# Altium PCB STM32F030C8T6.PcbDoc (part 1 of 2)
Units mil, origin at the board's own origin, x right, y up, seen from the top; angles counter-clockwise.
Board outline 2425 x 2425 mil, 2 copper layers (Top Layer, Bottom Layer); 23 components, 16 nets, 125 pads, 8 vias.
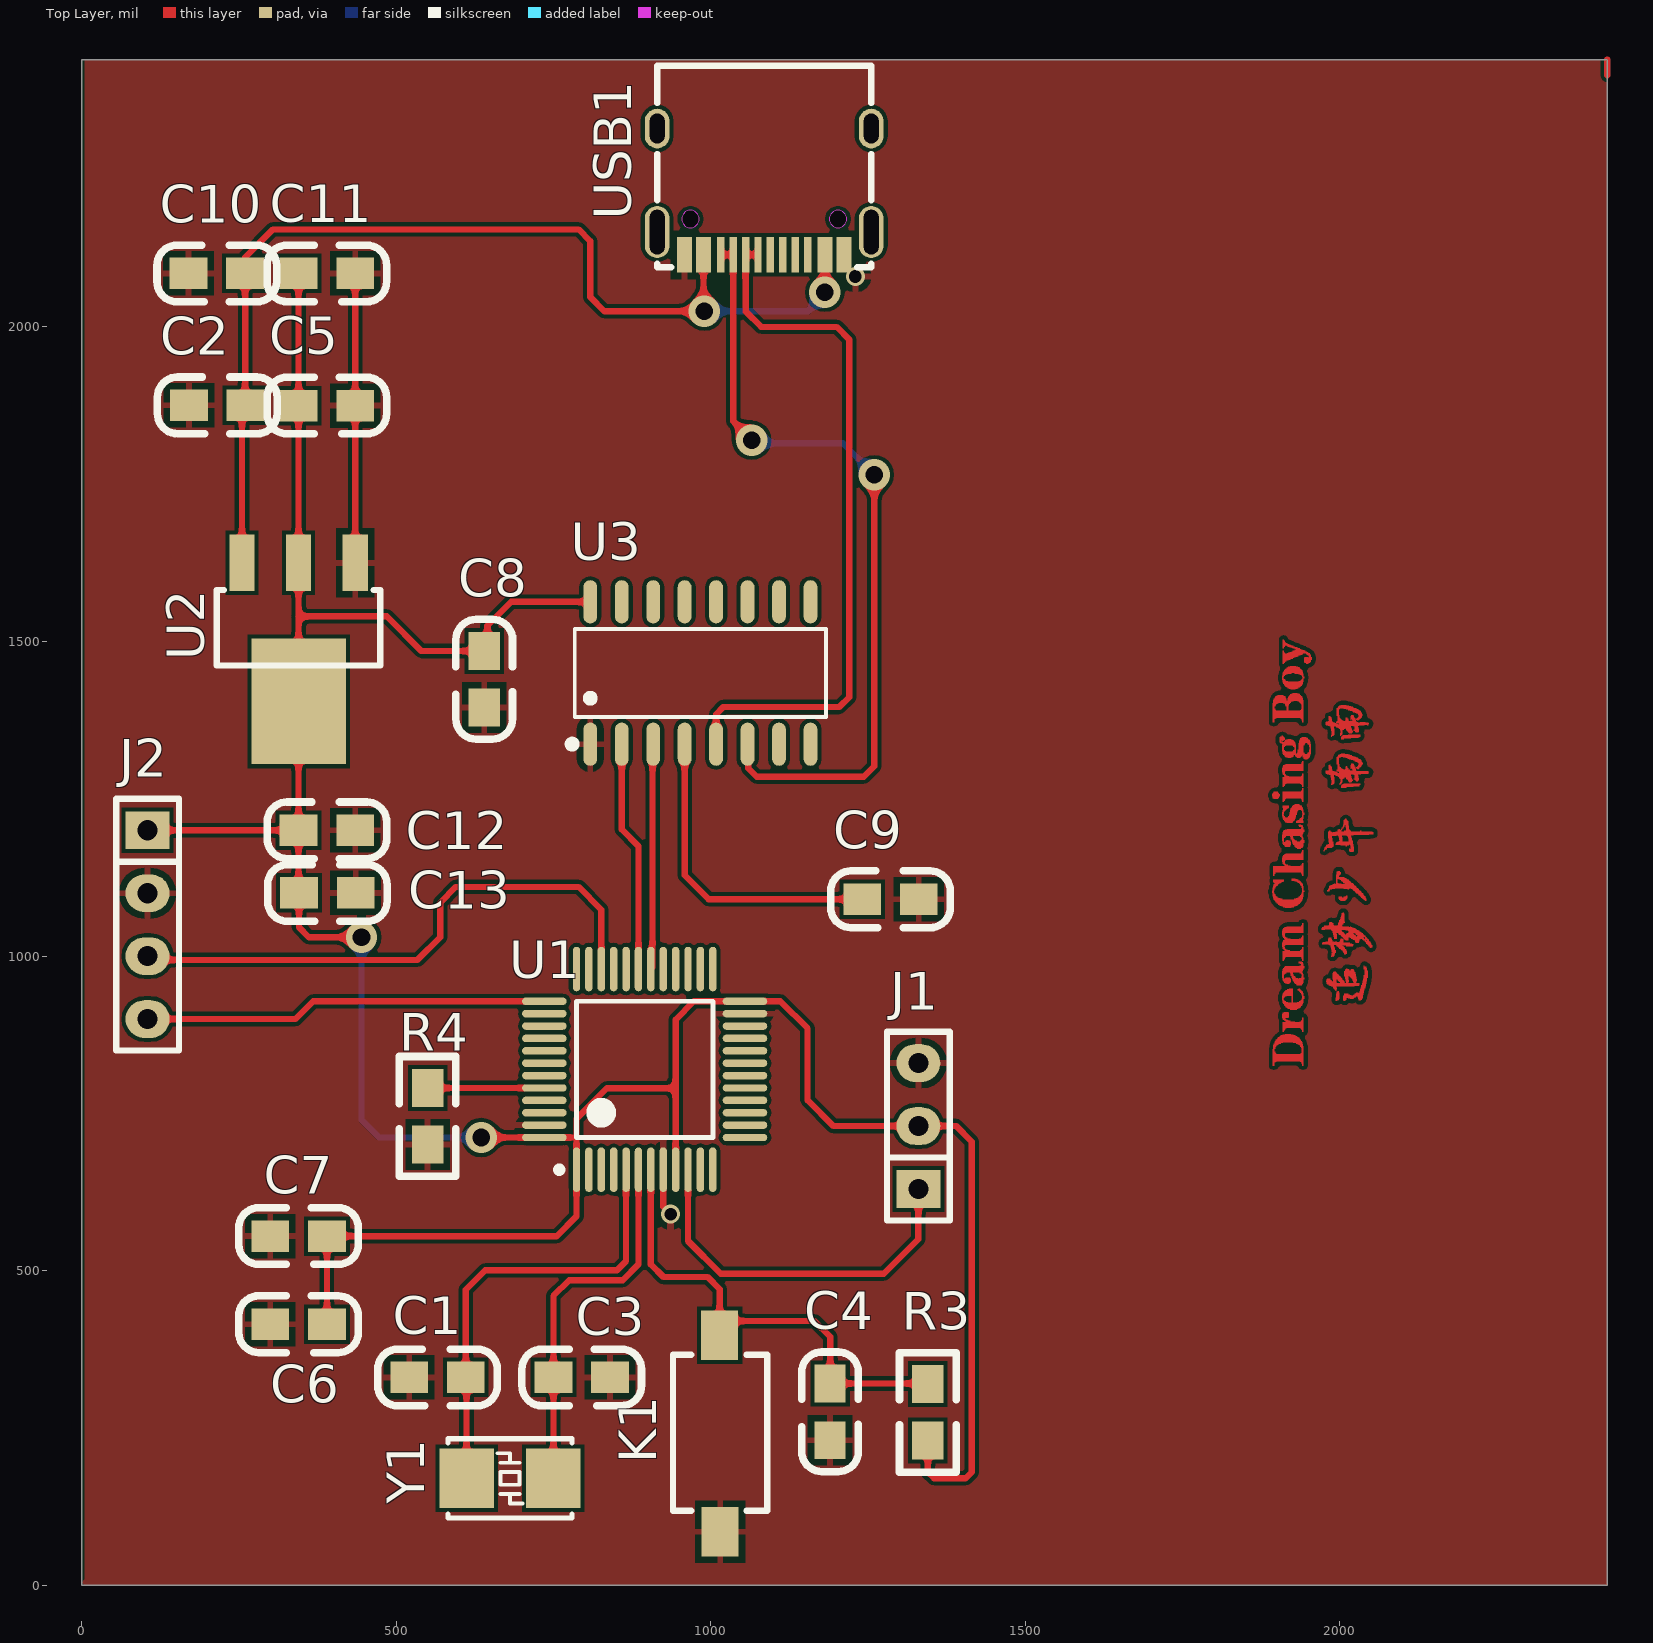
[diagram p0: Top Layer view]
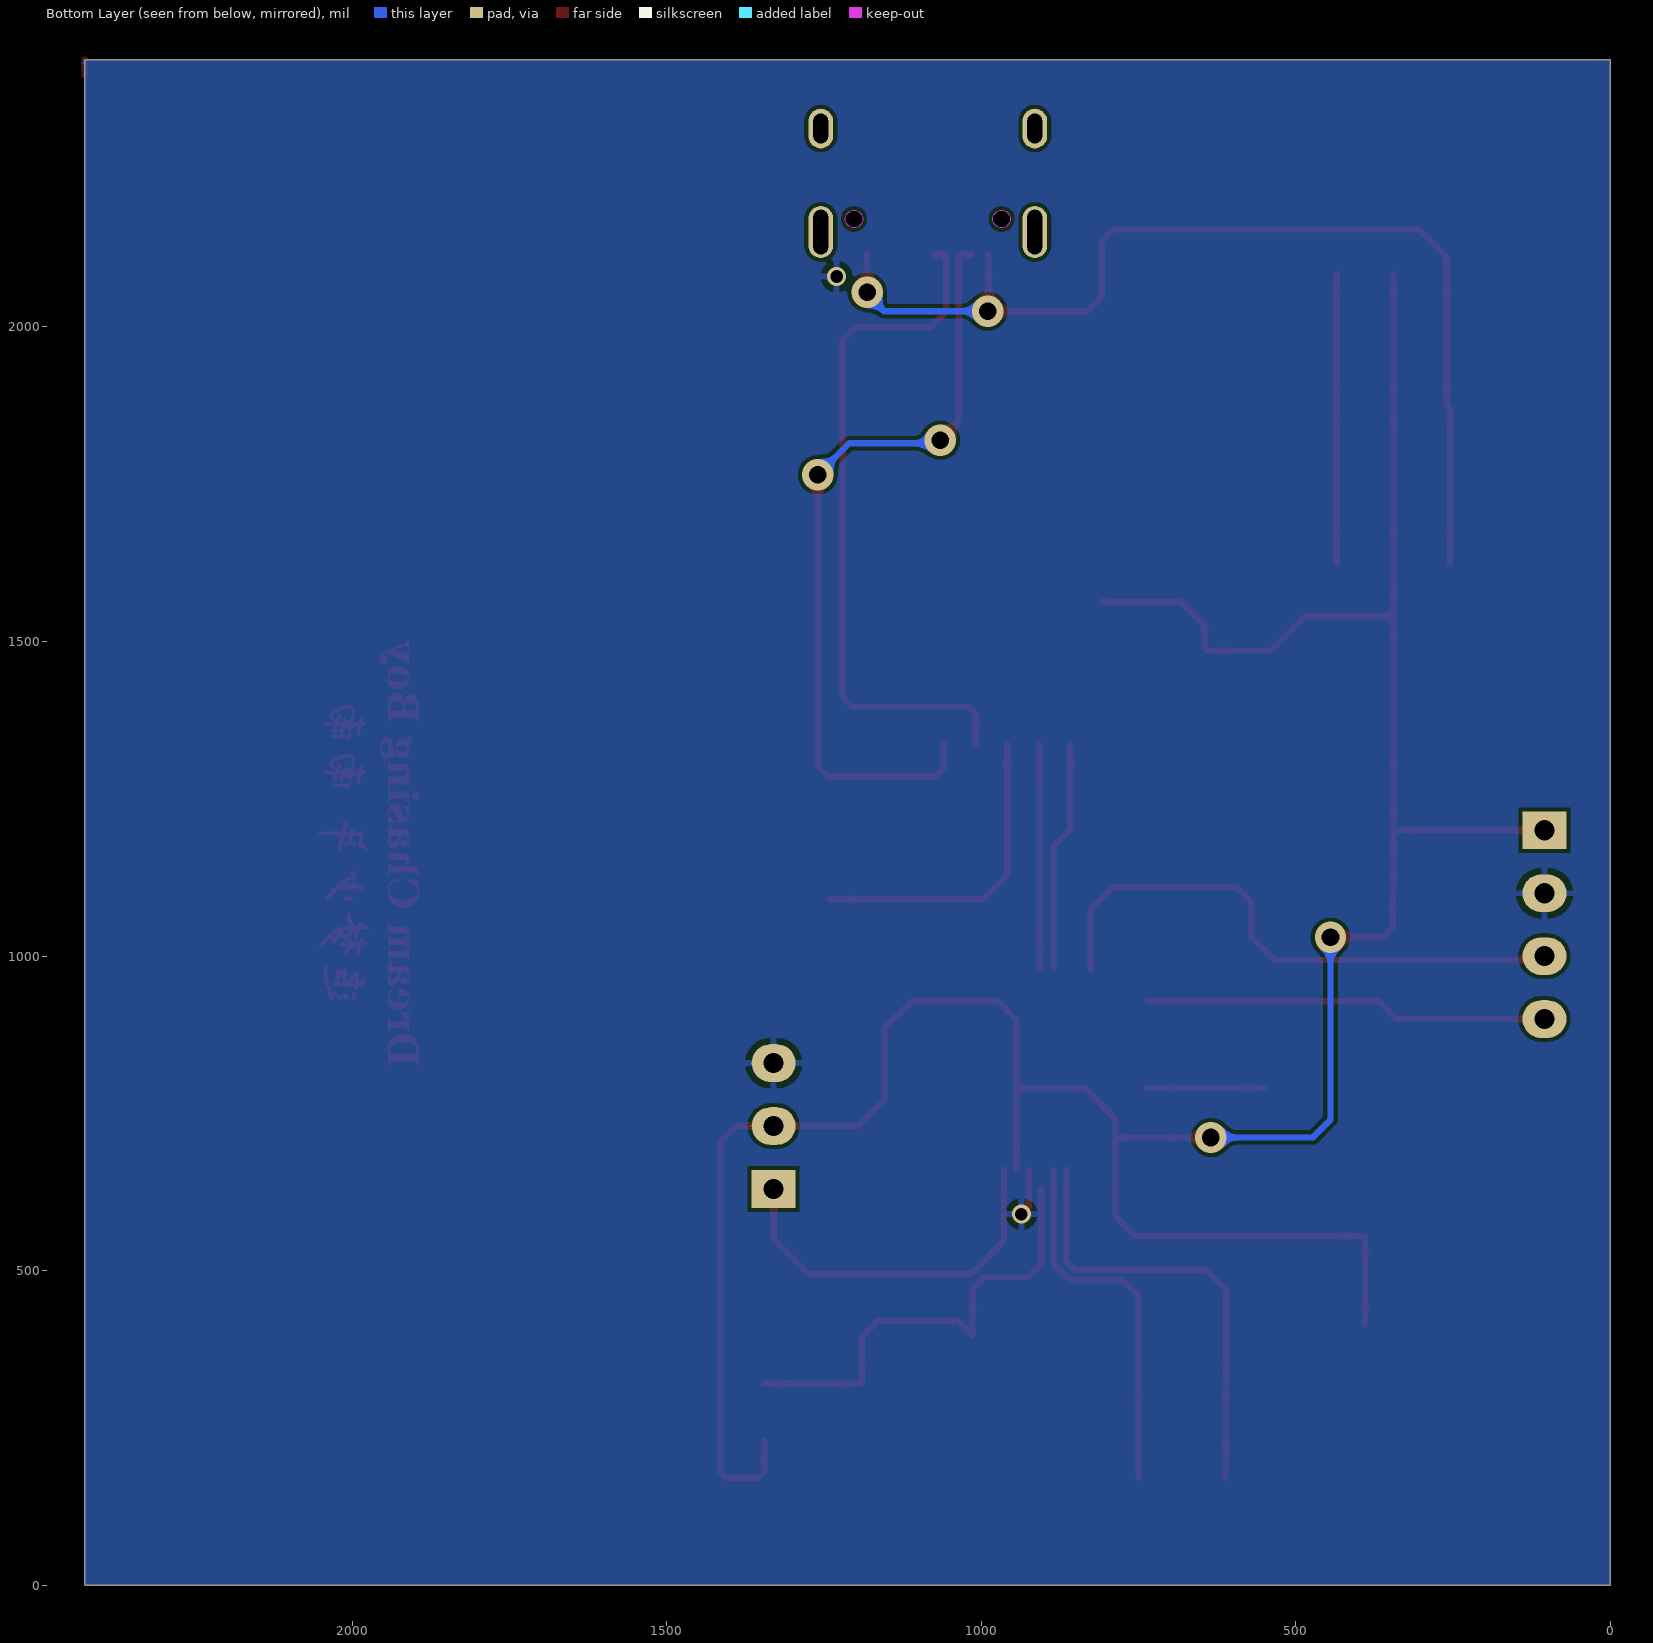
[diagram p1: Bottom Layer view, seen from below]
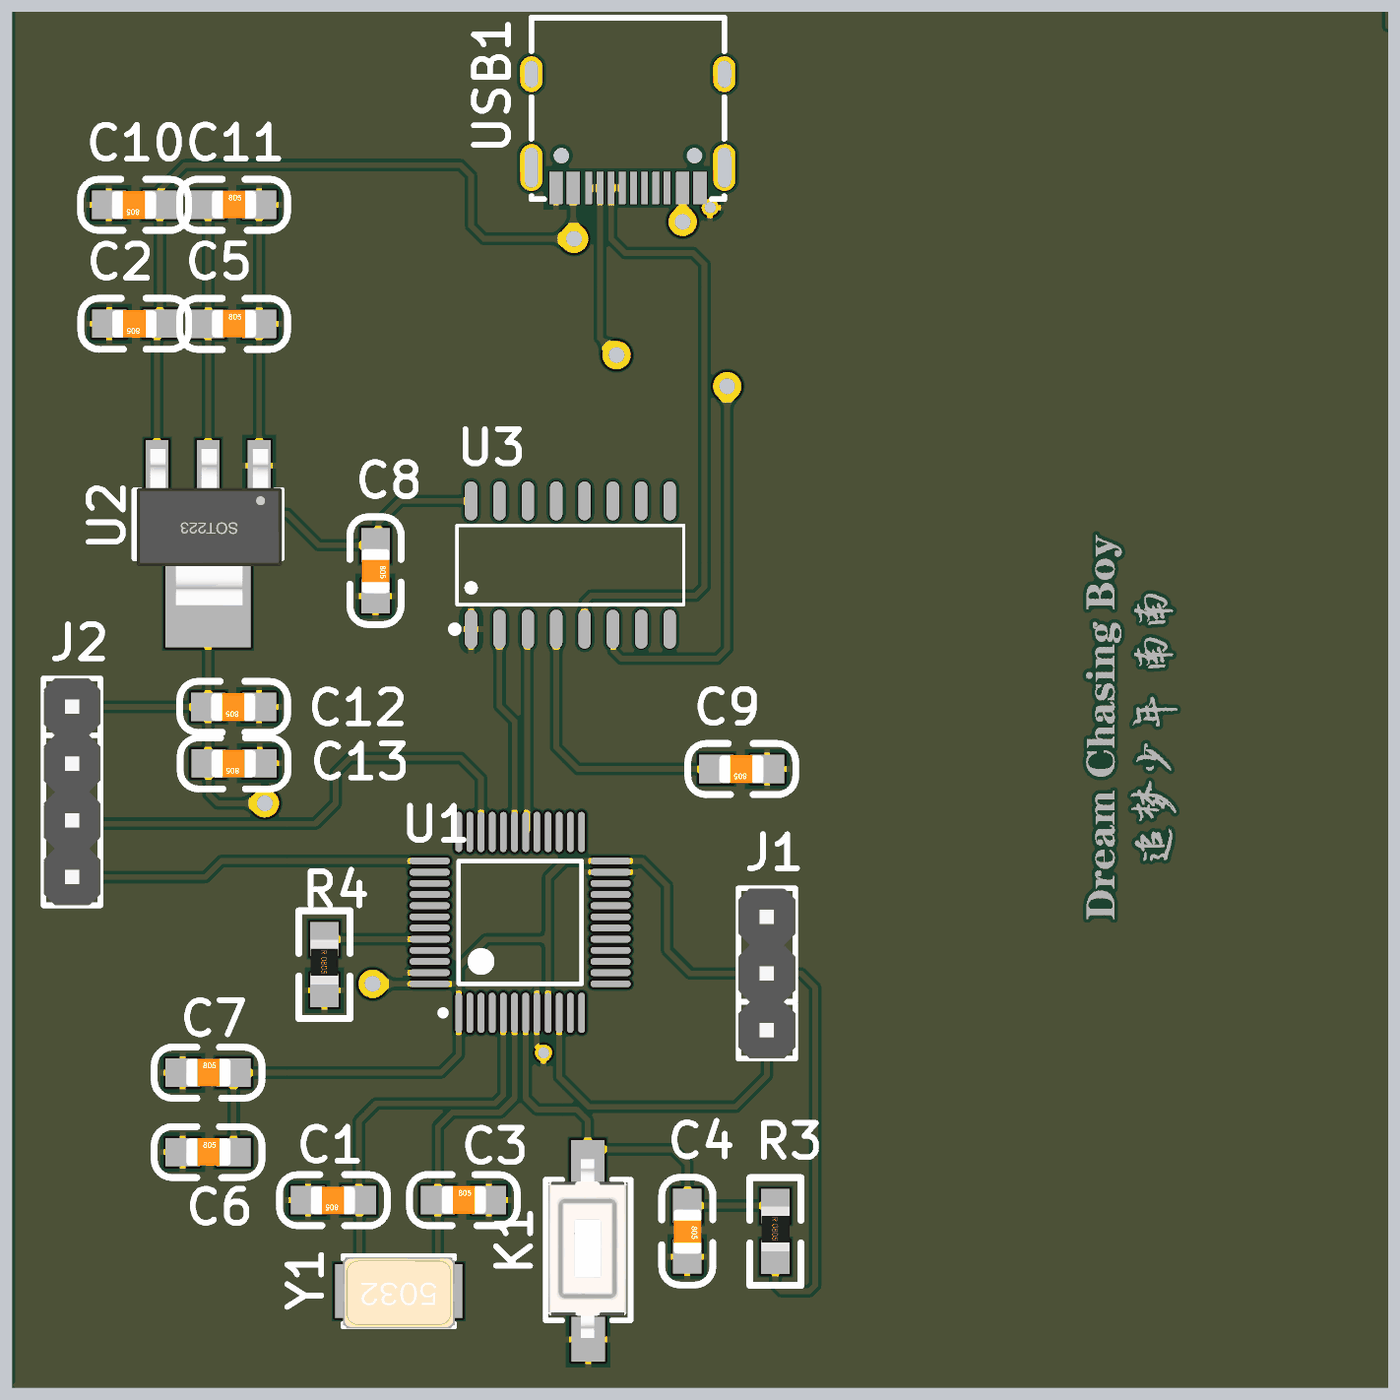
[diagram p3: 3D render of the assembled board from above, using the file's embedded part models]

## Layer stack, top to bottom
Top Solder: solder mask 0.4, Solder Resist, Dk 3.5
Top Layer: signal copper 1.4
Dielectric 1: dielectric 12.6, FR-4, Dk 4.8
Bottom Layer: signal copper 1.4
Bottom Solder: solder mask 0.4, Solder Resist, Dk 3.5

## Board outline
0,0 0,2425 2425,2425 2425,0

## Design rules (kind name [scope] priority, off if disabled: settings)
Clearance [All] p1: gap=6 ignorepadtopadclearanceinfootprint=TRUE except(0: Arc-Hole Track-Hole SMDPad-Hole THPad-Hole Via-Hole Fill-Hole Poly-Hole Region-Hole Text-Hole)
PolygonConnect [All] p1: connectstyle=Relief reliefconductorwidth=10 reliefentries=4 polygonreliefangle="90 Angle" airgapwidth=10
RoutingVias [All] p1: holewidth=28 width=50 viastyle="Through Hole" minholewidth=28 minwidth=50 maxholewidth=28 maxwidth=50
SolderMaskExpansion [All] p1: expansion=4
Width [All] p1: maxlimit=10 minlimit=10 preferedwidth=10
30 further rules are at their usual default settings.

## Components (designator, comment, footprint, x,y, rotation, side; value= is the part's Value field where it differs from the comment)
C1 "104" 0805C 610,330 r180 top
C2 "104" 0805C 260,1875 r180 top
C3 "104" 0805C 750.71,330.8 r0 top
C4 "104" 0805C 1190,320 r270 top
C5 "104" 0805C 345.71,1875.4 r0 top
C6 "104" 0805C 300.71,415.4 r0 top
C7 "104" 0805C 300.71,555.4 r0 top
C8 "104" 0805C 640.4,1484.29 r270 top
C9 "104" 0805C 1330,1090 r180 top
C10 "104" 0805C 259.29,2084.6 r180 top
C11 "104" 0805C 345.71,2085.4 r0 top
C12 "104" 0805C 434.29,1199.6 r180 top
C13 "104" 0805C 435,1100 r180 top
J1 "Pin HDR1X3" "Pin HDR1X3/2.54mm-S" 1330,630 r180 top
J2 "Pin HDR1X4" "Pin HDR1X4/2.54mm-S" 105,1200 r0 top
K1 "KEY" SMD-3X6X2.5 1015,395 r270 top
R3 "10K" 0805R 1345,320 r270 top
R4 "10K" 0805R 550,790.47 r270 top
U1 "STM32F030C8T6" STM-LQFP48_N 895,820 r90 top
U2 "AMS1117" SOT223 345,1625 r180 top
U3 "CH340C" SOP-16_L10.0-W3.9-P1.27-LS6.0-BL 983.58,1450 r0 top
USB1 "TYPEC" USB-C-SMD_TYPEC-304-BCP16 1085,2215 r180 top locked
Y1 "8MHz" "OSC 5032-2P" 681.1,170 r180 top

## Footprints (in the part's own frame and the unit in brackets; to place one, negate y for a bottom-side part, rotate by r counter-clockwise, add the part's x,y. Pads: shape width x height; smd on the part's side, far side on the other; paste and mask are expansions set on the pad)
0805C [mil]
  rect 60x50 smd: 1(-0.71,-0.4) 2(89.29,-0.4)
  silkscreen extent -51,-45 139,45, body extent 6,-25 84,25, height 31
0805R [mil]
  rect 60x50 smd: 1(0,0) 2(90,0)
  silkscreen extent -50,-45 140,45, body extent 1,-25 80,25, height 15
"OSC 5032-2P" [mm]
  rect 2.2x2.4 smd: 1(-1.75,0) 2(1.75,0)
  silkscreen extent -2.5,-1.6 2.5,1.6, body extent -2.5,-1.52 2.5,1.68, height 0.86
"Pin HDR1X3/2.54mm-S" [mil]
  rect 70x60 hole 32: 1(0,0)
  oval 70x60 hole 32: 2(0,-100) 3(0,-200)
  silkscreen extent -50,-250 50,50, body extent -50,-250 50,50, height 336
"Pin HDR1X4/2.54mm-S" [mil]
  rect 70x60 hole 32: 1(0,0)
  oval 70x60 hole 32: 2(0,-100) 3(0,-200) 4(0,-300)
  silkscreen extent -50,-350 50,50, body extent -50,-350 50,50, height 336
SMD-3X6X2.5 [mm]
  rect 2x1.5 smd: 1(-0.059,-0.02) 3(7.874,0)
  silkscreen extent 0.73,-1.9 7.03,1.9, body extent -0.19,-1.78 7.81,1.72, height 2.59
SOP-16_L10.0-W3.9-P1.27-LS6.0-BL [mm]
  oval 0.56x1.745 smd mask+0.051: 1(-4.445,-2.872) 2(-3.175,-2.872) 3(-1.905,-2.872) 4(-0.635,-2.872) 5(0.635,-2.872) 6(1.905,-2.872) 7(3.175,-2.872) 8(4.445,-2.872) 9(4.445,2.872) 10(3.175,2.872) 11(1.905,2.872) 12(0.635,2.872) 13(-0.635,2.872) 14(-1.905,2.872) 15(-3.175,2.872) 16(-4.445,2.872)
  silkscreen extent -5.33,-3.02 5.08,1.77
SOT223 [mil]
  rect 40x90 smd: 1(-90,0) 2(0,0) 3(90,0)
  rect 150x200 smd: 2(0,220)
  silkscreen extent -130,43 130,163, body extent -130,-30 126,246, height 65
STM-LQFP48_N [mm] "QFP, 48-Leads, Body 7x7mm, Pitch 0.5mm, IPC Medium Density"
  oval 1.8x0.3 smd: 1(-4.05,2.75) 2(-4.05,2.25) 3(-4.05,1.75) 4(-4.05,1.25) 5(-4.05,0.75) 6(-4.05,0.25) 7(-4.05,-0.25) 8(-4.05,-0.75) 9(-4.05,-1.25) 10(-4.05,-1.75) 11(-4.05,-2.25) 12(-4.05,-2.75) 25(4.05,-2.75) 26(4.05,-2.25) 27(4.05,-1.75) 28(4.05,-1.25) 29(4.05,-0.75) 30(4.05,-0.25) 31(4.05,0.25) 32(4.05,0.75) 33(4.05,1.25) 34(4.05,1.75) 35(4.05,2.25) 36(4.05,2.75)
  oval 0.3x1.8 smd: 13(-2.75,-4.05) 14(-2.25,-4.05) 15(-1.75,-4.05) 16(-1.25,-4.05) 17(-0.75,-4.05) 18(-0.25,-4.05) 19(0.25,-4.05) 20(0.75,-4.05) 21(1.25,-4.05) 22(1.75,-4.05) 23(2.25,-4.05) 24(2.75,-4.05) 37(2.75,4.05) 38(2.25,4.05) 39(1.75,4.05) 40(1.25,4.05) 41(0.75,4.05) 42(0.25,4.05) 43(-0.25,4.05) 44(-0.75,4.05) 45(-1.25,4.05) 46(-1.75,4.05) 47(-2.25,4.05) 48(-2.75,4.05)
  silkscreen extent -4.17,-2.75 2.75,3.57, body extent -3.5,-3.5 3.5,3.5, height 1.6
USB-C-SMD_TYPEC-304-BCP16 [mil]
  oval 39.4x82.7 hole 23.6 slot 70.9 at 90 deg mask+2: 13(-170.1,64.3) 14(170.1,64.3)
  oval 39.4x63 hole 23.6 slot 47.2 at 90 deg mask+2: 15(-170.1,-100.3) 16(170.1,-100.3)
  rect 23.6x57.1 smd mask+2: A1B12(-127,100.3) A4B9(-96.5,100.3) B1A12(126.8,100.3) B4A9(96.5,100.3)
  rect 11.8x57.1 smd mask+2: A5(-49.2,100.3) A6(-9.8,100.3) A7(9.8,100.3) A8(49.2,100.3) B5(68.9,100.3) B6(29.5,100.3) B7(-29.5,100.3) B8(-68.9,100.3)
  Keep-Out Layer board cut-out: -103.5,43.4 -103.5,46.14 -105.6,51.22 -109.48,55.1 -114.56,57.2 -120.05,57.2 -125.12,55.1 -129,51.22 -131.1,46.14 -131.1,43.4 -131.1,40.66 -129,35.58 -125.12,31.7 -120.05,29.6 -114.56,29.6 -109.48,31.7 -105.6,35.58 -103.5,40.66 -103.5,43.4 -103.5,43.4
  Keep-Out Layer board cut-out: 131.1,43.4 131.1,46.14 129,51.22 125.12,55.1 120.04,57.2 114.56,57.2 109.48,55.1 105.6,51.22 103.5,46.14 103.5,43.4 103.5,40.66 105.6,35.58 109.48,31.7 114.56,29.6 120.04,29.6 125.12,31.7 129,35.58 131.1,40.66 131.1,43.4 131.1,43.4
  silkscreen extent -170,-200 170,120

## Part data
C1 C2 C3 C4 C5 C6 C7 C8 C9 C10 C11 C12 C13: library part CAP, "无极性电容"
R3 R4: library part RES
U1: "ARM Cortex-M0 32-bit MCU, 64 KB Flash, 8 KB Internal RAM, 39 I/Os, 48-pin LQFP, -40 to 85 degC, Tray", I/Os (High Current)=39, Operating Frequency(F) (Processor speed) (MHz)=48, Supplier Part Number 1=497-14043-ND, Supply Voltage(Vcc) min (V)=2.4, ComponentLink1Description="Manufacturer URL", ComponentLink1URL=http://www.st.com/web/en/home.html, ComponentLink2Description=Datasheet, ComponentLink2URL=http://www.st.com/st-web-ui/static/active/en/resource/technical/document/datasheet/DM00088500.pdf, ComponentLink3Description="Package Specification", ComponentLink3URL=http://www.st.com/st-web-ui/static/active/en/resource/technical/document/datasheet/DM00058181.pdf, Core="ARM Cortex-M0", DatasheetVersion="Rev. 1", FLASH Size (Prog) (kB)=64, Internal RAM Size (kB)=8, Mounting Technology="Surface Mount", PackageDescription="48-Pin Low Profile Quad Flat Package, 7 x 7 mm Body, 0.5 mm Pitch", PackageReference=LQFP48, PackageVersion="Rev. 6, 06/2013", Packing=Tray, PartNumber=STM32F030C8T6, Supplier 1=Digi-Key, Supplier 2=Newark, Supplier 3=Mouser, Supplier Part Number 2=06X3647, Supplier Part Number 3=511-STM32F030C8T6
U2: "三端稳压芯片"
U3: library part CH340G
USB1: library part TYPEC-304-BCP16_C720629, Current Rating - Power (Max)=3A, JLCPCB Part Class="Extended Part", LCSC Part Name="Type-C Ä¸×ù Î", Manufacturer=XUNPU(Ѷ?, Manufacturer Part=TYPEC-304-BCP16, Operating Temperature Range=-25℃~+85?, Welding Temperature (Max)=260℃, Add into BOM=yes, Connector Type=Type-C, Convert to PCB=yes, Datasheet=https://atta.szlcsc.com/upload/public/pdf/source/20220210/1FE0FEFF7D6A20C111212527D3DED014.pdf, Device=TYPEC-304-BCP16_C720629, Gender=ĸ?, Mounting Style=卧?, Name=TYPEC-304-BCP16, Number of Contacts=16, Number of Ports=1, Standard="USB 3.1", Supplier=LCSC, Supplier Footprint=SMD, Supplier Part=C720629, Symbol=TYPEC-304-BCP16
Y1: library part XTAL-2P, "2脚无源脚晶振"

## Via types
v1: diameter 50, hole 28, Top Layer to Bottom Layer, 6 vias
v2: diameter 30, hole 20, Top Layer to Bottom Layer, 2 vias

## Nets (pads, with @x,y where several pads share a name; then routed paths per layer and width w, separated by ;. In a path a pad name is that pad's centre, name@x,y a point inside that pad or via, vN(x,y) a via of type N, cw(c..) or ccw(c..) an arc to the next point about the centre after c; other vN are vias at no path point)
3V3: C5.1 C6.2 C7.2 C8.1 C11.1 C12.2 C13.2 J1.2 J2.1 R3.2 U1.1 U1.9 U1.24 U1.48 U2.2 U3.16 | length 4986.1
  Top Layer w10: J2.1@105,1200 C12.2@345,1200 ; C11.1@345,2085 C5.1@345,1875 U2.2@345,1625 345,1540 ; C12.2@345.71,1200.71 C12.2@345,1200 ; C6.2@390,415 C7.2@390,555 755,555 786.73,586.73 U1.1@786.73,660.55 786.73,710 ; v1(445,1030) 361.41,1030 345.71,1045.71 C13.2@345.71,1100.4 345,1101.11 C12.2@345,1200 ; v1(635,711.73) U1.48@735.55,711.73 785,711.73 786.73,710 ; U3.16@808.58,1563.09 683.09,1563.09 645,1525 645,1490 C8.1@640,1485 540,1485 485,1540 345,1540 ; U1.9@944.21,660.55 944.21,790 ; R3.2@1345,230 1345,180 1355,170 1405,170 1415,180 1415,705 1390,730 J1.2@1330,730 1195,730 1153.9,771.1 1153.9,885.1 1110.73,928.27 U1.24@1054.45,928.27 973.27,928.27 944.21,899.21 944.21,790 ; C12.2@345,1200 U2.2@345,1405 345,1540 ; 786.73,710 786.73,741.73 835,790 944.21,790
  Bottom Layer w10: v1(445,1030) 445,740 473.27,711.73 v1(635,711.73)
5V: C2.1 C10.1 U2.3 USB1.A4B9 USB1.B4A9 | length 1703.6
  Top Layer w10: U2.3@255,1625 255,1869.69 C2.1@260.71,1875.4 260,1876.11 C10.1@260,2085 260,2110.7 304.3,2155 790,2155 808.58,2136.42 808.58,2047.52 831.1,2025 v1(990,2025) 988.5,2026.5 USB1.B4A9@988.5,2114.7 ; v1(1181.5,2055) USB1.A4B9@1181.5,2114.7
  Bottom Layer w10: v1(990,2025) 1155,2025 1185,2055 v1(1181.5,2055)
+5: 
D+: U3.5 USB1.A7 USB1.B6 | length 1131.6
  Top Layer w10: U3.5@1008.58,1336.91 1008.58,1384.58 1020,1396 1204.58,1396 1220,1411.42 1220,1980 1200,2000 1080,2000 1055.5,2024.5 USB1.B6@1055.5,2114.7 USB1.A7@1075.2,2114.7
D-: U3.6 USB1.A8 USB1.B5 | length 1259.1
  Top Layer w10: USB1.B5@1016.1,2114.7 USB1.A8@1035.8,2114.7 1035.8,1850 1065,1820.8 v1(1065,1820) ; U3.6@1058.58,1336.91 1059.49,1336 1059.49,1298.71 1073.2,1285 1243,1285 1260,1302 v1(1260,1765.1)
  Bottom Layer w10: v1(1065,1820) 1070,1815 1210.1,1815 v1(1260,1765.1)
GND: C1.2 C2.2 C3.2 C4.2 C5.2 C6.1 C7.1 C8.2 C9.1 C10.2 C11.2 C12.1 C13.1 J1.3 J2.2 K1.3 R4.2 U1.8 U1.23 U1.47 U2.1 U3.1 USB1.A1B12 USB1.B1A12 | length 535.4
  Top Layer w10: U2.1@435,1625 C5.2@435,1875 C11.2@435,2085 ; U1.8@924.53,660.55 924.53,601.75 v2(936.28,590)
  other v2: 1230,2080.15
NetC9_2: C9.2 U3.4 | length 506.4
  Top Layer w10: U3.4@958.58,1336.91 958.58,1128.42 996.6,1090.4 C9.2@1240.71,1090.4
NetR4_1: R4.1 U1.44 | length 185.6
  Top Layer w10: R4.1@550,790.47 U1.44@735.55,790.47
OSC_IN: C1.1 U1.5 Y1.2 | length 719.9
  Top Layer w10: Y1.2@612.2,170 611.8,170.4 611.8,330.4 C1.1@610.71,330.4 610.71,470 641.71,501 851,501 865.47,515.47 U1.5@865.47,660.55
OSC_OUT: C3.1 U1.6 Y1.1 | length 596.3
  Top Layer w10: Y1.1@750,170 C3.1@750,330.4 750,460 775,485 860,485 885.16,510.16 U1.6@885.16,660.55
PA0: J1.1 U1.10 | length 603.9
  Top Layer w10: U1.10@963.9,660.55 963.9,547.2 1016.1,495 1275,495 1330,550 J1.1@1330,630
Reset: C4.1 K1.1 R3.1 U1.7 | length 744.7
  Top Layer w10: U1.7@904.84,630 904.84,510.06 924.9,490 995,490 1014.21,470.79 K1.1@1014.21,397.31 1036.9,420 1165,420 1190,395 1190,321.11 C4.1@1189.6,320.71 1344.29,320.71 R3.1@1345,320
RXD: U1.31 U3.2 | length 368.5
  Top Layer w10: U3.2@858.58,1336.91 858.58,1201.42 885.16,1174.84 U1.31@885.16,979.45
SWCLK: J2.4 U1.37 | length 642.3
  Top Layer w10: J2.4@105,900 340,900 368.27,928.27 U1.37@735.55,928.27
SWDIO: J2.3 U1.34 | length 913.3
  Top Layer w10: J2.3@105,1000 111,994 534,994 570,1030 570,1085 595,1110 790,1110 826.1,1073.9 U1.34@826.1,979.45
TXD: U1.30 U3.3 | length 359
  Top Layer w10: U1.30@904.84,979.45 907.62,982.23 907.62,1335.95 U3.3@908.58,1336.91
pads on no net: U1.2 U1.3 U1.4 U1.11 U1.12 U1.13 U1.14 U1.15 U1.16 U1.17 U1.18 U1.19 U1.20 U1.21 U1.22 U1.25 U1.26 U1.27 U1.28 U1.29 U1.32 U1.33 U1.35 U1.36 U1.38 U1.39 U1.40 U1.41 U1.42 U1.43 U1.45 U1.46 U3.7 U3.8 U3.9 U3.10 U3.11 U3.12 U3.13 U3.14 U3.15 USB1.13 USB1.14 USB1.15 USB1.16 USB1.A5 USB1.A6 USB1.B7 USB1.B8